# Altium PCB subsystem_intro_prj_archive.PcbDoc
Units mil, origin at the board's own origin, x right, y up, seen from the top; angles counter-clockwise.
Board outline 6000 x 4000 mil, 2 copper layers (Top Layer, Bottom Layer); 11 components, 0 nets, 45 pads, 0 vias.
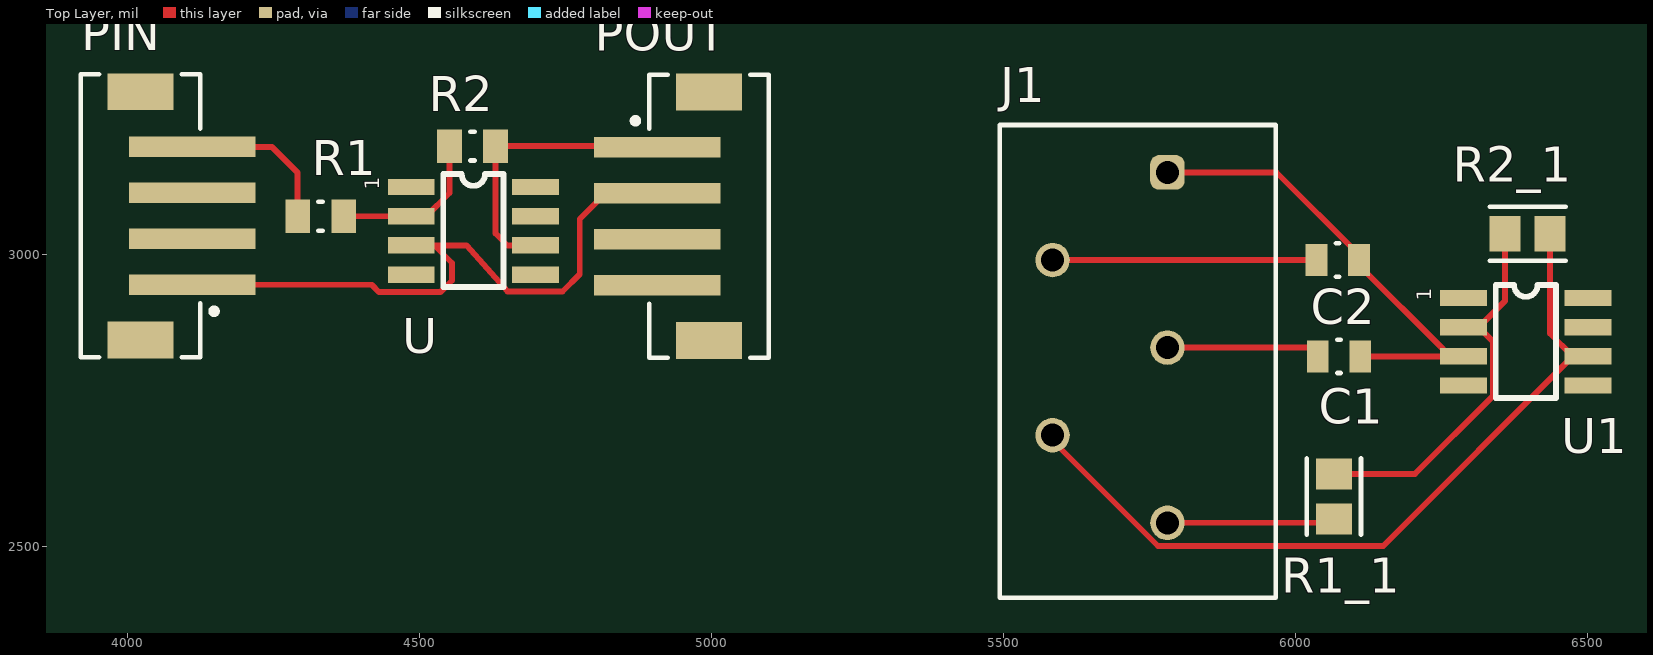
[diagram p0: Top Layer view]
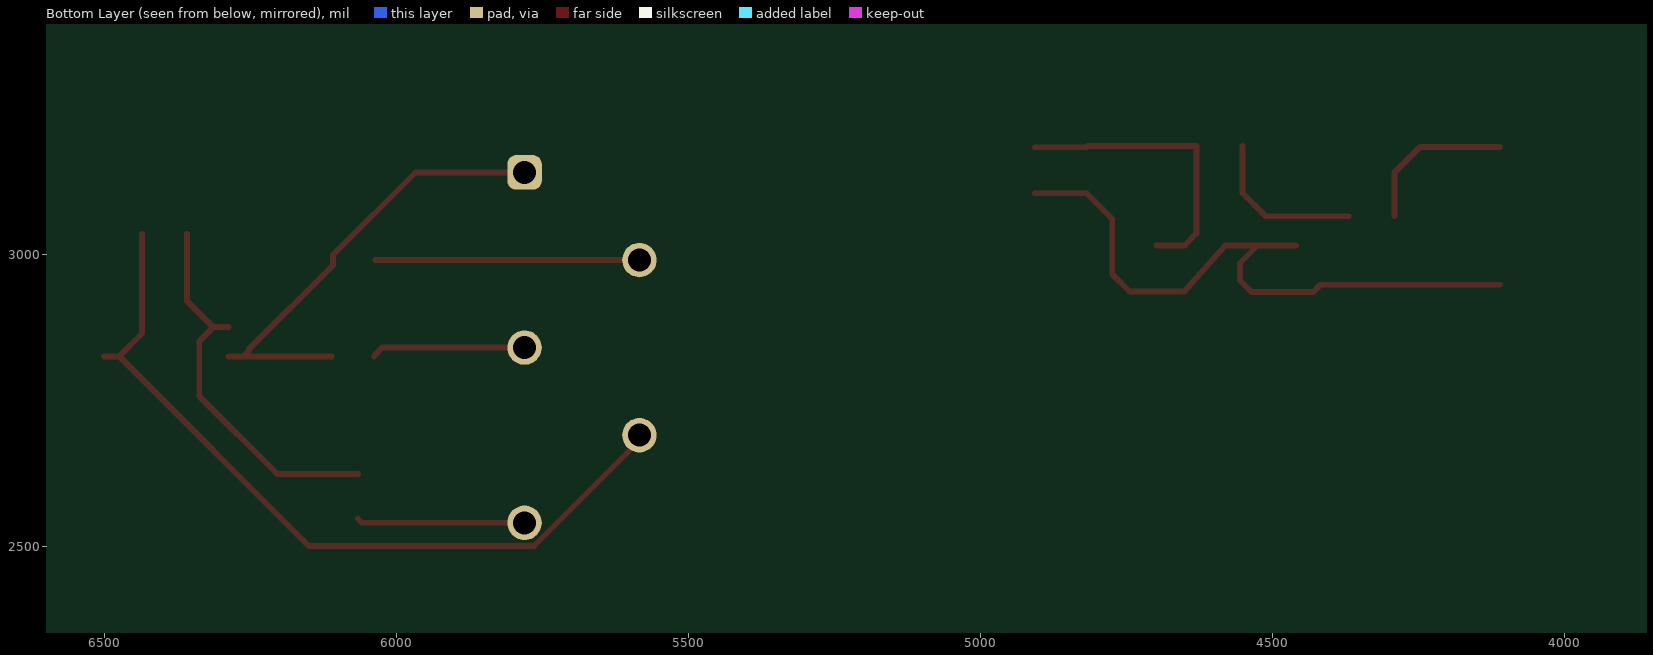
[diagram p1: Bottom Layer view, seen from below]

## Layer stack, top to bottom
Top Solder: solder mask 0.4, Solder Resist, Dk 3.5
Top Layer: signal copper 1.4
Dielectric 1: dielectric 12.6, FR-4, Dk 4.8
Bottom Layer: signal copper 1.4
Bottom Solder: solder mask 0.4, Solder Resist, Dk 3.5

## Board outline
1000,1000 7000,1000 7000,5000 1000,5000

## Design rules (kind name [scope] priority, off if disabled: settings)
Clearance [All] p1: gap=10 ignorepadtopadclearanceinfootprint=FALSE
PolygonConnect [All] p1: connectstyle=Relief reliefconductorwidth=10 reliefentries=4 polygonreliefangle="90 Angle" airgapwidth=10
RoutingVias [All] p1: holewidth=28 width=50 viastyle="Through Hole" minholewidth=28 minwidth=50 maxholewidth=28 maxwidth=50
SolderMaskExpansion [All] p1: expansion=4 istentingtop=FALSE
Width [All] p1: maxlimit=10 minlimit=10 preferedwidth=10
30 further rules are at their usual default settings.

## Components (designator, comment, footprint, x,y, rotation, side; value= is the part's Value field where it differs from the comment)
C1 "CC0805KRX7R9BB104" FP-CC0805-0_85-MFG 6073.58,2825 r0 top value="100 nF"
C2 "CC0805KRX7R9BB104" FP-CC0805-0_85-MFG 6071.42,2990 r0 top value="100 nF"
J1 "691412320005" 691412320005 5728.82,2816.57 r90 top
PIN "620304124022" 620304124022 4021.42,3065.63 r270 top
POUT "620304124022" 620304124022 4995,3065 r90 top
R1 "1k" RESC2013X60X35ML10T20#1 4330,3065 r0 top
R1_1 "RR1220P-103-D" FP-RR1220-IPC_A 6065,2585 r90 top (schematic designator R1)
R2 "1k" RESC2013X60X35ML10T20#2 4590,3185 r0 top
R2_1 "RR1220P-103-D" FP-RR1220-IPC_A 6396.59,3035 r0 top (schematic designator R2)
U "TL061ACD" TL061ACD 4485,3115 r0 top
U1 "TL061ACD" TL061ACD 6287,2925 r0 top

## Footprints (in the part's own frame and the unit in brackets; to place one, negate y for a bottom-side part, rotate by r counter-clockwise, add the part's x,y. Pads: shape width x height; smd on the part's side, far side on the other; paste and mask are expansions set on the pad)
620304124022 [mm] "2.00mm SMT Male Vertical Shrouded Header, 4p"
  rect 0.892x5.5 smd: 1(3,2.25) 2(1,2.25) 3(-1,2.25) 4(-3,2.25)
  rect 1.6x2.873 smd: MP1(-5.4,0) MP2(5.4,0)
  silkscreen extent -6.15,-2.6 6.15,3.32, body extent -6,-2.5 6,4.51, height 6.77
691412320005 [mm] "3.81mm 45¡ã Cable Entry Screwless, 5p"
  rrect50% 1.5x1.5 hole 1: 1(8.215,-1.3)
  round 1.5 hole 1: 2(4.405,3.7) 3(0.595,-1.3) 4(-3.215,3.7) 5(-7.025,-1.3)
  silkscreen extent -10.28,-6 10.28,6, body extent -10.28,-6 10.28,6, height 13.28
FP-CC0805-0_85-MFG [mm]
  rect 0.95x1.4 smd paste+0 mask+0: 1(-0.925,0) 2(0.925,0)
  silkscreen extent -0.08,-0.72 0.08,0.72, body extent -1.6,-1.05 1.6,1.05, height 0.25
FP-RR1220-IPC_A [mil]
  rect 53.34x61.27 smd paste+0 mask+0: 1(-38.41,0) 2(38.41,0)
  silkscreen extent -65,-46 65,46, body extent -85,-50 85,50, height 10
RESC2013X60X35ML10T20#1 [mm] "Chip Resistor, 2-Leads, Body 2.1x1.35mm, IPC Low Density"
  rect 1.073x1.45 smd: 1(-1,0) ""(1,0)
  silkscreen extent -0.1,-0.62 0.1,0.62, body extent -1.05,-0.68 1.05,0.67, height 0.6
RESC2013X60X35ML10T20#2 [mm] "Chip Resistor, 2-Leads, Body 2.1x1.35mm, IPC Low Density"
  rect 1.073x1.45 smd: 1(-1,0) 2(1,0)
  silkscreen extent -0.1,-0.62 0.1,0.62, body extent -1.05,-0.68 1.05,0.67, height 0.6
TL061ACD [mil]
  rect 80x28 smd: 1(0,0) 2(0,-50) 3(0,-100) 4(0,-150) 5(213,-150) 6(213,-100) 7(213,-50) 8(213,0)
  silkscreen extent 55,-171 158,22, body extent -17,-173 227,23, height 70

## Part data
C1 C2: library part CMP-2100-03606-3, "CAP CER 0.1UF 50V X7R 0805", Capacitance="100 nF", Manufacturer=Yageo, Package=CC0805-0.85, Temperature="-30°C to +85°C", Temperature Characteristic=X7R, Temperature Range High=+85°C, Temperature Range Low=-30°C, Tolerance=0.1, Voltage Rating="50 V", Automotive=No, Category=Cap, ComponentLink2Description=Datasheet, ComponentLink2URL=http://www.yageo.com/documents/recent/UPY-GPHC_Y5V_6.3V-to-50V_8.pdf, Device Class L1="Passive Components", Device Class L2=Capacitors, Device Class L3="Ceramic Capacitors", Digikey Description="CAP CER 0.1UF 50V X7R 0805", Footprint Url=http://www.yageo.com/exep/pages/download/literatures/UPY-C_GEN_24.pdf, Height=0.95mm, Ipc Land Pattern Name=CAPC200125X85, Lead Free=Yes, Manufacturer Part Number=CC0805KRX7R9BB104, Material=Ceramic, Mouser Description="Multilayer Ceramic Capacitors MLCC - SMD/SMT 100nF 50V X7R 10%", Octopart=https://octopart.com/cc0805krx7r9bb104-yageo-192993, RoHS=TRUE
J1: library part CMP-1502-02954-2, Lead Pitch=3.81mm, NexarPartId=78871498, Number of Pins=5, Packaging=Box, RoHS=Non-Compliant
PIN POUT: library part CMP-1502-00662-2, Color="Beige, White", Contact Resistance=20mΩ, Current Rating=2A, Flammability Rating="UL94 V-0", Insulation Resistance=1GΩ, Max Operating Temperature=85°C, Min Operating Temperature=-40°C, Operating Supply Voltage=100V, Voltage Rating=125V, Connector Type="Male Pin", Contact Gender=Male, Contact Material=Copper, Contact Mating Length=3.5052mm, Contact Plating=Tin, Gender=Male, Height=6.6mm, Housing Material=Nylon, Insulation=Insulated, Lead Free="Lead Free", Lead Pitch=2mm, Length=9mm, Mount="Surface Mount", NexarPartId=18818244, Number of Contacts=4, Number of Pins=4, Number of Positions=4, Number of Rows=1, Orientation=Vertical, Packaging="Tape and Reel", Pitch=2mm, REACH SVHC=Unknown, RoHS=Compliant, Termination=SMD/SMT, Width=11.9mm
R1 R2: library part CMP-2001-03215-2, "10kΩ ±0.5% 0.1W 1/10W Chip Resistor 0805 (2012 Metric) Thin Film", Case Code (Imperial)=0805, Case Code (Metric)=2012, Manufacturer=Yageo, Max Operating Temperature=155degC, Max Power Dissipation=125mW, Min Operating Temperature=-55degC, Package Description="2-Pin Surface Mounted Device, Body 2 x 1.25 mm", Package Quantity=1, Resistance=1KOhm, Temperature Coefficient=100ppm/degreesC, Tolerance=1%, Voltage Rating=150V, Case/Package=0805, Composition=ThickFilm, Datasheet URL=http://www.yageo.com/NewPortal/yageodocoutput?fileName=/pdf/R-Chip/PYu-RC_Group_51_RoHS_L_5.pdf, Datasheet Version="Rev. 5, 10/2016", Depth=1.25mm, Height=0.024inch, Lead Free=LeadFree, Length=0.079inch, Manufacturer URL=http://www.yageo.com/, Military Standard=Not, Number of Pins=2, Number of Terminations=2, Package Reference=0805, Packaging=TapeandReel, Power Rating=125mW, REACH SVHC=Unknown, RoHSCompliant=true, Termination=SMD/SMT, Voltage Rating (DC)=150V, Width=0.049inch
R1_1 R2_1: library part CMP-2001-03215-2, "10kΩ ±0.5% 0.1W 1/10W Chip Resistor 0805 (2012 Metric) Thin Film", Case Code (Imperial)=0805, Case Code (Metric)=2012, Max Operating Temperature=125°C, Max Power Dissipation=100mW, Min Operating Temperature=-55°C, Package Quantity=1, Resistance=10k, Resistance Tolerance=0.5%, Resistor Type="Thin Film", Temperature Coefficient=25ppm/°C, Voltage Rating=100V, Case/Package=0805, Depth=1.25mm, Height=0.4mm, Lead Free="Lead Free", Length=2mm, Number of Terminations=2, Packaging="Tape and Reel", Power Rating=100mW, RoHS Compliant=Yes, Series=RR, Size Code=0805, Technology="THIN FILM", Termination=SMD/SMT, Tolerance=0.5%, Voltage Rating (DC)=100V, Weight=0.000194oz, Width=1.25mm

## Nets (pads, with @x,y where several pads share a name; then routed paths per layer and width w, separated by ;. In a path a pad name is that pad's centre, name@x,y a point inside that pad or via, vN(x,y) a via of type N, cw(c..) or ccw(c..) an arc to the next point about the centre after c; other vN are vias at no path point)
pads on no net: C1.1 C1.2 C2.1 C2.2 J1.1 J1.2 J1.3 J1.4 J1.5 PIN.1 PIN.2 PIN.3 PIN.4 PIN.MP1 PIN.MP2 POUT.1 POUT.2 POUT.3 POUT.4 POUT.MP1 POUT.MP2 R1. R1.1 R1_1.1 R1_1.2 R2.1 R2.2 R2_1.1 R2_1.2 U1.1 U1.2 U1.3 U1.4 U1.5 U1.6 U1.7 U1.8 U.1 U.2 U.3 U.4 U.5 U.6 U.7 U.8
copper on no net: | length 6020.5
  Top Layer w10: 4110,2947.52 4417.52,2947.52 4430.04,2935 4535,2935 4555,2955 4555,2985 4525,3015 ; 4110,3183.74 4246.26,3183.74 4290.63,3139.37 4290.63,3065 ; 4369.37,3065 4485,3065 4511,3065 4550.63,3104.63 4550.63,3185 ; 4459,3015 4485,3015 4515.63,3015 4525,3015 ; 4698,3015 4650,3015 4629.37,3035.63 4629.37,3185 4816.11,3185 4818,3183.11 4906.42,3183.11 ; 4906.42,3104.37 4817.83,3104.37 4773.68,3060.22 4773.68,2965.47 4744.21,2936 4650,2936 4580,3015 4525,3015 ; 5583.15,2690 5583.15,2680.95 5763.63,2500.47 6149.47,2500.47 6474,2825 ; 5583.15,2990 6035,2990 ; 5780,2540 6058.41,2540 6065,2546.59 ; 5780,2840 6023.46,2840 6037.17,2826.3 6037.17,2825 ; 5780,3140 5966.69,3140 6107.83,2998.86 6107.83,2990 6107.83,2981.14 6252,2836.98 6252,2834 6261,2825 ; 6065,2623.41 6203.55,2623.41 6337,2756.86 6337,2851 6313,2875 ; 6110,2825 6261,2825 ; 6287,2825 6261,2825 ; 6287,2875 6313,2875 ; 6358.18,3035 6358.18,2920.18 6313,2875 ; 6435,3035 6435,2864 6474,2825 ; 6500,2825 6474,2825

## Text inside footprints (layer, text, board x,y; h text height)
U: Top Overlay "1" at 4430,3110 h25 r90
U1: Top Overlay "1" at 6232,2920 h25 r90